# Altium PCB PCB1.PcbDoc (part 1 of 2)
Units mil, origin at the board's own origin, x right, y up, seen from the top; angles counter-clockwise.
Board outline 1945 x 1820 mil, 2 copper layers (Top Layer, Bottom Layer); 144 components, 11 nets, 468 pads, 0 vias.
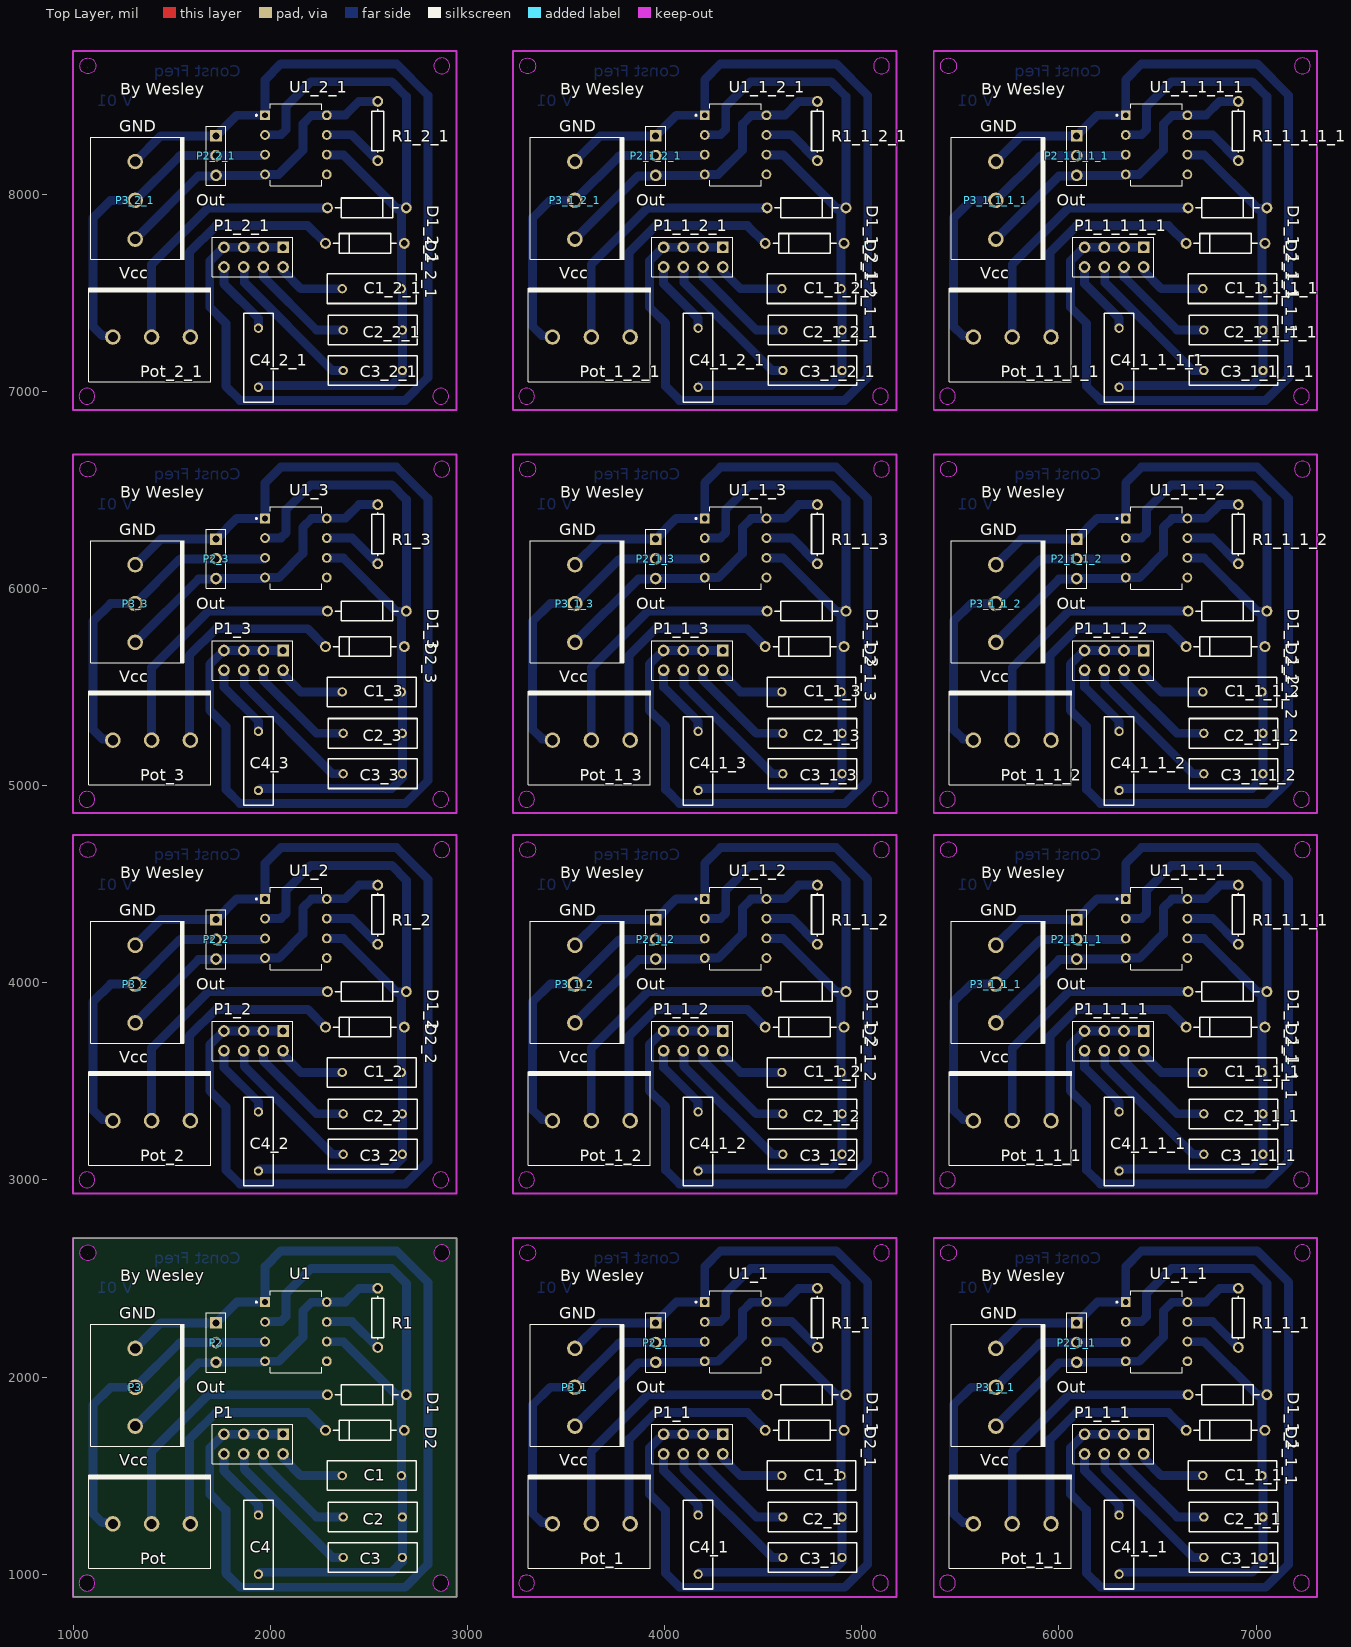
[diagram p0: Top Layer view]
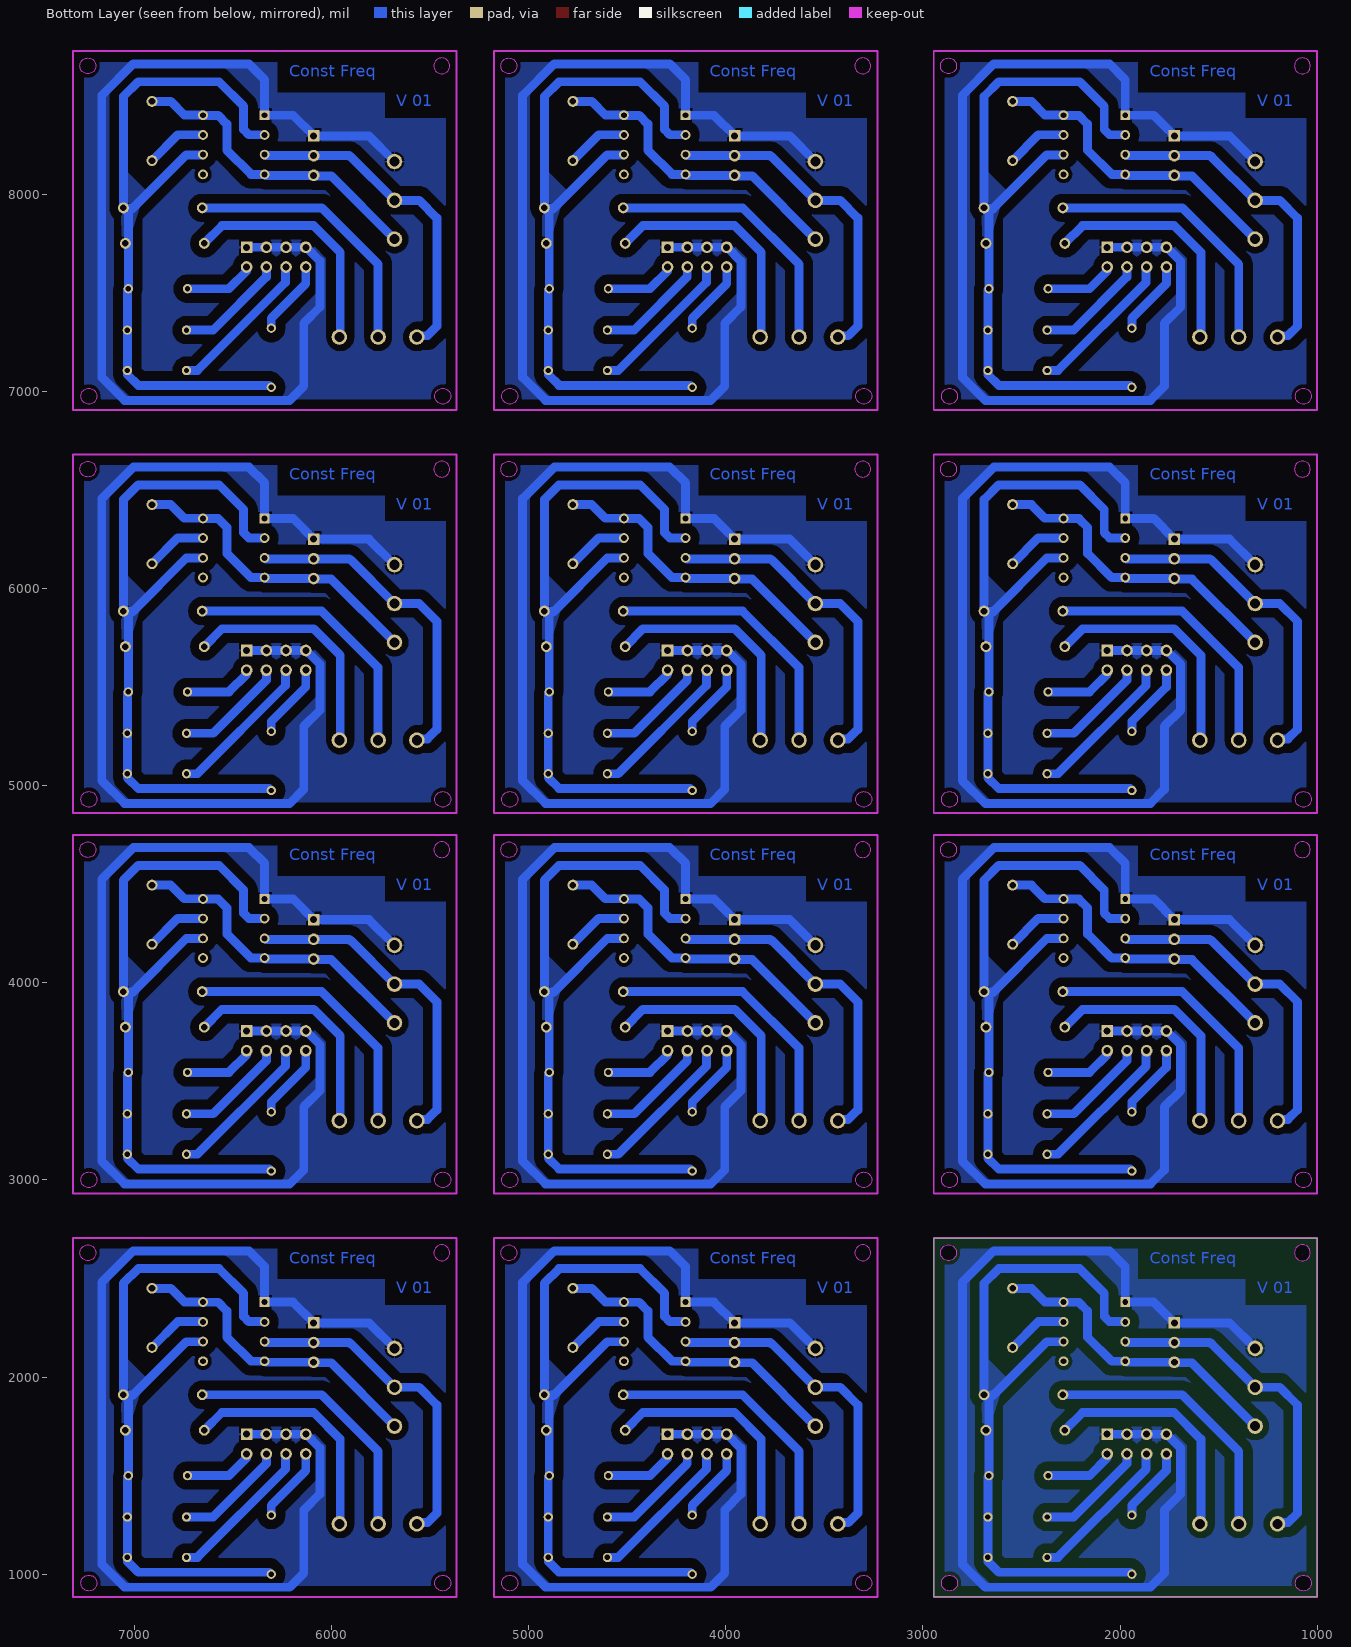
[diagram p1: Bottom Layer view, seen from below]

## Layer stack, top to bottom
Top Solder: solder mask 0.4, Solder Resist, Dk 3.5
Top Layer: signal copper 1.4
Dielectric 1: dielectric 12.6, FR-4, Dk 4.8
Bottom Layer: signal copper 1.4
Bottom Solder: solder mask 0.4, Solder Resist, Dk 3.5

## Board outline
1000,885 2945,885 2945,2705 1000,2705
cut-out: 1075,6595
cut-out: 1029.69,4930 ccw(c1070,4930) 1070,4889.69 ccw(c1070,4930) 1110.31,4930 ccw(c1070,4930) 1070,4970.31 ccw(c1070,4930)
cut-out: 1075,6564.69 cw(c1075,6605) 1034.69,6605 cw(c1075,6605) 1075,6645.31 cw(c1075,6605) 1115.31,6605 cw(c1075,6605)
cut-out: 2829.69,6605 ccw(c2870,6605) 2870,6564.69 ccw(c2870,6605) 2910.31,6605 ccw(c2870,6605) 2870,6645.31 ccw(c2870,6605)
cut-out: 2824.69,4930 ccw(c2865,4930) 2865,4889.69 ccw(c2865,4930) 2905.31,4930 ccw(c2865,4930) 2865,4970.31 ccw(c2865,4930)
cut-out: 5054.69,4930 ccw(c5095,4930) 5095,4889.69 ccw(c5095,4930) 5135.31,4930 ccw(c5095,4930) 5095,4970.31 ccw(c5095,4930)
cut-out: 5059.69,6605 ccw(c5100,6605) 5100,6564.69 ccw(c5100,6605) 5140.31,6605 ccw(c5100,6605) 5100,6645.31 ccw(c5100,6605)
cut-out: 3305,6564.69 cw(c3305,6605) 3264.69,6605 cw(c3305,6605) 3305,6645.31 cw(c3305,6605) 3345.31,6605 cw(c3305,6605)
cut-out: 3259.69,4930 ccw(c3300,4930) 3300,4889.69 ccw(c3300,4930) 3340.31,4930 ccw(c3300,4930) 3300,4970.31 ccw(c3300,4930)
cut-out: 3305,6595
cut-out: 5440,6595
cut-out: 5394.69,4930 ccw(c5435,4930) 5435,4889.69 ccw(c5435,4930) 5475.31,4930 ccw(c5435,4930) 5435,4970.31 ccw(c5435,4930)
cut-out: 5440,6564.69 cw(c5440,6605) 5399.69,6605 cw(c5440,6605) 5440,6645.31 cw(c5440,6605) 5480.31,6605 cw(c5440,6605)
cut-out: 7194.69,6605 ccw(c7235,6605) 7235,6564.69 ccw(c7235,6605) 7275.31,6605 ccw(c7235,6605) 7235,6645.31 ccw(c7235,6605)
cut-out: 7189.69,4930 ccw(c7230,4930) 7230,4889.69 ccw(c7230,4930) 7270.31,4930 ccw(c7230,4930) 7230,4970.31 ccw(c7230,4930)
cut-out: 7189.69,6975 ccw(c7230,6975) 7230,6934.69 ccw(c7230,6975) 7270.31,6975 ccw(c7230,6975) 7230,7015.31 ccw(c7230,6975)
cut-out: 7194.69,8650 ccw(c7235,8650) 7235,8609.69 ccw(c7235,8650) 7275.31,8650 ccw(c7235,8650) 7235,8690.31 ccw(c7235,8650)
cut-out: 5440,8609.69 cw(c5440,8650) 5399.69,8650 cw(c5440,8650) 5440,8690.31 cw(c5440,8650) 5480.31,8650 cw(c5440,8650)
cut-out: 5394.69,6975 ccw(c5435,6975) 5435,6934.69 ccw(c5435,6975) 5475.31,6975 ccw(c5435,6975) 5435,7015.31 ccw(c5435,6975)
cut-out: 5440,8640
cut-out: 3305,8640
cut-out: 3259.69,6975 ccw(c3300,6975) 3300,6934.69 ccw(c3300,6975) 3340.31,6975 ccw(c3300,6975) 3300,7015.31 ccw(c3300,6975)
cut-out: 3305,8609.69 cw(c3305,8650) 3264.69,8650 cw(c3305,8650) 3305,8690.31 cw(c3305,8650) 3345.31,8650 cw(c3305,8650)
cut-out: 5059.69,8650 ccw(c5100,8650) 5100,8609.69 ccw(c5100,8650) 5140.31,8650 ccw(c5100,8650) 5100,8690.31 ccw(c5100,8650)
cut-out: 5054.69,6975 ccw(c5095,6975) 5095,6934.69 ccw(c5095,6975) 5135.31,6975 ccw(c5095,6975) 5095,7015.31 ccw(c5095,6975)
cut-out: 2824.69,6975 ccw(c2865,6975) 2865,6934.69 ccw(c2865,6975) 2905.31,6975 ccw(c2865,6975) 2865,7015.31 ccw(c2865,6975)
cut-out: 2829.69,8650 ccw(c2870,8650) 2870,8609.69 ccw(c2870,8650) 2910.31,8650 ccw(c2870,8650) 2870,8690.31 ccw(c2870,8650)
cut-out: 1075,8609.69 cw(c1075,8650) 1034.69,8650 cw(c1075,8650) 1075,8690.31 cw(c1075,8650) 1115.31,8650 cw(c1075,8650)
cut-out: 1029.69,6975 ccw(c1070,6975) 1070,6934.69 ccw(c1070,6975) 1110.31,6975 ccw(c1070,6975) 1070,7015.31 ccw(c1070,6975)
cut-out: 1075,8640
cut-out: 1075,4665
cut-out: 1029.69,3000 ccw(c1070,3000) 1070,2959.69 ccw(c1070,3000) 1110.31,3000 ccw(c1070,3000) 1070,3040.31 ccw(c1070,3000)
cut-out: 1075,4634.69 cw(c1075,4675) 1034.69,4675 cw(c1075,4675) 1075,4715.31 cw(c1075,4675) 1115.31,4675 cw(c1075,4675)
cut-out: 2829.69,4675 ccw(c2870,4675) 2870,4634.69 ccw(c2870,4675) 2910.31,4675 ccw(c2870,4675) 2870,4715.31 ccw(c2870,4675)
cut-out: 2824.69,3000 ccw(c2865,3000) 2865,2959.69 ccw(c2865,3000) 2905.31,3000 ccw(c2865,3000) 2865,3040.31 ccw(c2865,3000)
cut-out: 5054.69,3000 ccw(c5095,3000) 5095,2959.69 ccw(c5095,3000) 5135.31,3000 ccw(c5095,3000) 5095,3040.31 ccw(c5095,3000)
cut-out: 5059.69,4675 ccw(c5100,4675) 5100,4634.69 ccw(c5100,4675) 5140.31,4675 ccw(c5100,4675) 5100,4715.31 ccw(c5100,4675)
cut-out: 3305,4634.69 cw(c3305,4675) 3264.69,4675 cw(c3305,4675) 3305,4715.31 cw(c3305,4675) 3345.31,4675 cw(c3305,4675)
cut-out: 3259.69,3000 ccw(c3300,3000) 3300,2959.69 ccw(c3300,3000) 3340.31,3000 ccw(c3300,3000) 3300,3040.31 ccw(c3300,3000)
cut-out: 3305,4665
cut-out: 5440,4665
cut-out: 5394.69,3000 ccw(c5435,3000) 5435,2959.69 ccw(c5435,3000) 5475.31,3000 ccw(c5435,3000) 5435,3040.31 ccw(c5435,3000)
cut-out: 5440,4634.69 cw(c5440,4675) 5399.69,4675 cw(c5440,4675) 5440,4715.31 cw(c5440,4675) 5480.31,4675 cw(c5440,4675)
cut-out: 7194.69,4675 ccw(c7235,4675) 7235,4634.69 ccw(c7235,4675) 7275.31,4675 ccw(c7235,4675) 7235,4715.31 ccw(c7235,4675)
cut-out: 7189.69,3000 ccw(c7230,3000) 7230,2959.69 ccw(c7230,3000) 7270.31,3000 ccw(c7230,3000) 7230,3040.31 ccw(c7230,3000)
cut-out: 7189.69,955 ccw(c7230,955) 7230,914.69 ccw(c7230,955) 7270.31,955 ccw(c7230,955) 7230,995.31 ccw(c7230,955)
cut-out: 7194.69,2630 ccw(c7235,2630) 7235,2589.69 ccw(c7235,2630) 7275.31,2630 ccw(c7235,2630) 7235,2670.31 ccw(c7235,2630)
cut-out: 5440,2589.69 cw(c5440,2630) 5399.69,2630 cw(c5440,2630) 5440,2670.31 cw(c5440,2630) 5480.31,2630 cw(c5440,2630)
cut-out: 5394.69,955 ccw(c5435,955) 5435,914.69 ccw(c5435,955) 5475.31,955 ccw(c5435,955) 5435,995.31 ccw(c5435,955)
cut-out: 5440,2620
cut-out: 3305,2620
cut-out: 3259.69,955 ccw(c3300,955) 3300,914.69 ccw(c3300,955) 3340.31,955 ccw(c3300,955) 3300,995.31 ccw(c3300,955)
cut-out: 3305,2589.69 cw(c3305,2630) 3264.69,2630 cw(c3305,2630) 3305,2670.31 cw(c3305,2630) 3345.31,2630 cw(c3305,2630)
cut-out: 5059.69,2630 ccw(c5100,2630) 5100,2589.69 ccw(c5100,2630) 5140.31,2630 ccw(c5100,2630) 5100,2670.31 ccw(c5100,2630)
cut-out: 5054.69,955 ccw(c5095,955) 5095,914.69 ccw(c5095,955) 5135.31,955 ccw(c5095,955) 5095,995.31 ccw(c5095,955)
cut-out: 2824.69,955 ccw(c2865,955) 2865,914.69 ccw(c2865,955) 2905.31,955 ccw(c2865,955) 2865,995.31 ccw(c2865,955)
cut-out: 2829.69,2630 ccw(c2870,2630) 2870,2589.69 ccw(c2870,2630) 2910.31,2630 ccw(c2870,2630) 2870,2670.31 ccw(c2870,2630)
cut-out: 1075,2589.69 cw(c1075,2630) 1034.69,2630 cw(c1075,2630) 1075,2670.31 cw(c1075,2630) 1115.31,2630 cw(c1075,2630)
cut-out: 1029.69,955 ccw(c1070,955) 1070,914.69 ccw(c1070,955) 1110.31,955 ccw(c1070,955) 1070,995.31 ccw(c1070,955)
cut-out: 1075,2620

## Design rules (kind name [scope] priority, off if disabled: settings)
Clearance [All] p1: gap=20 ignorepadtopadclearanceinfootprint=FALSE except(50: Arc-Fill Arc-Poly Arc-Region Track-Fill Track-Poly Track-Region Fill-Text Poly-Text Region-Text)
PolygonConnect [All] p1: connectstyle=Relief reliefconductorwidth=10 reliefentries=4 polygonreliefangle="90 Angle" airgapwidth=10
RoutingVias [All] p1: holewidth=28 width=50 viastyle="Through Hole" minholewidth=28 minwidth=50 maxholewidth=28 maxwidth=50
SolderMaskExpansion [All] p1: expansion=4
Width [All] p1: maxlimit=50 minlimit=40 preferedwidth=45 minimp=50.000000 maximp=50.000000 favimp=50.000000
30 further rules are at their usual default settings.

## Classes and differential pairs
component class Sheet1: C1 C2 C3 C4 D1 D2 P1 P2 P3 Pot R1 U1

## Components (designator, comment, footprint, x,y, rotation, side; value= is the part's Value field where it differs from the comment)
C1 "Cap" RAD-0.3 2515,1500 r0 top value=22uF
C1_1 "Cap" RAD-0.3 4745,1500 r0 top value=22uF (schematic designator C1)
C1_1_1 "Cap" RAD-0.3 6880,1500 r0 top value=22uF (schematic designator C1)
C1_1_1_1 "Cap" RAD-0.3 6880,3545 r0 top value=22uF (schematic designator C1)
C1_1_1_1_1 "Cap" RAD-0.3 6880,7520 r0 top value=22uF (schematic designator C1)
C1_1_1_2 "Cap" RAD-0.3 6880,5475 r0 top value=22uF (schematic designator C1)
C1_1_2 "Cap" RAD-0.3 4745,3545 r0 top value=22uF (schematic designator C1)
C1_1_2_1 "Cap" RAD-0.3 4745,7520 r0 top value=22uF (schematic designator C1)
C1_1_3 "Cap" RAD-0.3 4745,5475 r0 top value=22uF (schematic designator C1)
C1_2 "Cap" RAD-0.3 2515,3545 r0 top value=22uF (schematic designator C1)
C1_2_1 "Cap" RAD-0.3 2515,7520 r0 top value=22uF (schematic designator C1)
C1_3 "Cap" RAD-0.3 2515,5475 r0 top value=22uF (schematic designator C1)
C2 "Cap" RAD-0.3 2520,1290 r0 top value=100nF
C2_1 "Cap" RAD-0.3 4750,1290 r0 top value=100nF (schematic designator C2)
C2_1_1 "Cap" RAD-0.3 6885,1290 r0 top value=100nF (schematic designator C2)
C2_1_1_1 "Cap" RAD-0.3 6885,3335 r0 top value=100nF (schematic designator C2)
C2_1_1_1_1 "Cap" RAD-0.3 6885,7310 r0 top value=100nF (schematic designator C2)
C2_1_1_2 "Cap" RAD-0.3 6885,5265 r0 top value=100nF (schematic designator C2)
C2_1_2 "Cap" RAD-0.3 4750,3335 r0 top value=100nF (schematic designator C2)
C2_1_2_1 "Cap" RAD-0.3 4750,7310 r0 top value=100nF (schematic designator C2)
C2_1_3 "Cap" RAD-0.3 4750,5265 r0 top value=100nF (schematic designator C2)
C2_2 "Cap" RAD-0.3 2520,3335 r0 top value=100nF (schematic designator C2)
C2_2_1 "Cap" RAD-0.3 2520,7310 r0 top value=100nF (schematic designator C2)
C2_3 "Cap" RAD-0.3 2520,5265 r0 top value=100nF (schematic designator C2)
C3 "Cap" RAD-0.3 2520,1085 r0 top value=1uF
C3_1 "Cap" RAD-0.3 4750,1085 r0 top value=1uF (schematic designator C3)
C3_1_1 "Cap" RAD-0.3 6885,1085 r0 top value=1uF (schematic designator C3)
C3_1_1_1 "Cap" RAD-0.3 6885,3130 r0 top value=1uF (schematic designator C3)
C3_1_1_1_1 "Cap" RAD-0.3 6885,7105 r0 top value=1uF (schematic designator C3)
C3_1_1_2 "Cap" RAD-0.3 6885,5060 r0 top value=1uF (schematic designator C3)
C3_1_2 "Cap" RAD-0.3 4750,3130 r0 top value=1uF (schematic designator C3)
C3_1_2_1 "Cap" RAD-0.3 4750,7105 r0 top value=1uF (schematic designator C3)
C3_1_3 "Cap" RAD-0.3 4750,5060 r0 top value=1uF (schematic designator C3)
C3_2 "Cap" RAD-0.3 2520,3130 r0 top value=1uF (schematic designator C3)
C3_2_1 "Cap" RAD-0.3 2520,7105 r0 top value=1uF (schematic designator C3)
C3_3 "Cap" RAD-0.3 2520,5060 r0 top value=1uF (schematic designator C3)
C4 "Cap" RAD-0.3 1940,1150 r270 top value=10uF
C4_1 "Cap" RAD-0.3 4170,1150 r270 top value=10uF (schematic designator C4)
C4_1_1 "Cap" RAD-0.3 6305,1150 r270 top value=10uF (schematic designator C4)
C4_1_1_1 "Cap" RAD-0.3 6305,3195 r270 top value=10uF (schematic designator C4)
C4_1_1_1_1 "Cap" RAD-0.3 6305,7170 r270 top value=10uF (schematic designator C4)
C4_1_1_2 "Cap" RAD-0.3 6305,5125 r270 top value=10uF (schematic designator C4)
C4_1_2 "Cap" RAD-0.3 4170,3195 r270 top value=10uF (schematic designator C4)
C4_1_2_1 "Cap" RAD-0.3 4170,7170 r270 top value=10uF (schematic designator C4)
C4_1_3 "Cap" RAD-0.3 4170,5125 r270 top value=10uF (schematic designator C4)
C4_2 "Cap" RAD-0.3 1940,3195 r270 top value=10uF (schematic designator C4)
C4_2_1 "Cap" RAD-0.3 1940,7170 r270 top value=10uF (schematic designator C4)
C4_3 "Cap" RAD-0.3 1940,5125 r270 top value=10uF (schematic designator C4)
D1 "Diode" DIODE-0.4 2490,1910 r0 top
D1_1 "Diode" DIODE-0.4 4720,1910 r0 top (schematic designator D1)
D1_1_1 "Diode" DIODE-0.4 6855,1910 r0 top (schematic designator D1)
D1_1_1_1 "Diode" DIODE-0.4 6855,3955 r0 top (schematic designator D1)
D1_1_1_1_1 "Diode" DIODE-0.4 6855,7930 r0 top (schematic designator D1)
D1_1_1_2 "Diode" DIODE-0.4 6855,5885 r0 top (schematic designator D1)
D1_1_2 "Diode" DIODE-0.4 4720,3955 r0 top (schematic designator D1)
D1_1_2_1 "Diode" DIODE-0.4 4720,7930 r0 top (schematic designator D1)
D1_1_3 "Diode" DIODE-0.4 4720,5885 r0 top (schematic designator D1)
D1_2 "Diode" DIODE-0.4 2490,3955 r0 top (schematic designator D1)
D1_2_1 "Diode" DIODE-0.4 2490,7930 r0 top (schematic designator D1)
D1_3 "Diode" DIODE-0.4 2490,5885 r0 top (schematic designator D1)
D2 "Diode" DIODE-0.4 2480,1730 r180 top
D2_1 "Diode" DIODE-0.4 4710,1730 r180 top (schematic designator D2)
D2_1_1 "Diode" DIODE-0.4 6845,1730 r180 top (schematic designator D2)
D2_1_1_1 "Diode" DIODE-0.4 6845,3775 r180 top (schematic designator D2)
D2_1_1_1_1 "Diode" DIODE-0.4 6845,7750 r180 top (schematic designator D2)
D2_1_1_2 "Diode" DIODE-0.4 6845,5705 r180 top (schematic designator D2)
D2_1_2 "Diode" DIODE-0.4 4710,3775 r180 top (schematic designator D2)
D2_1_2_1 "Diode" DIODE-0.4 4710,7750 r180 top (schematic designator D2)
D2_1_3 "Diode" DIODE-0.4 4710,5705 r180 top (schematic designator D2)
D2_2 "Diode" DIODE-0.4 2480,3775 r180 top (schematic designator D2)
D2_2_1 "Diode" DIODE-0.4 2480,7750 r180 top (schematic designator D2)
D2_3 "Diode" DIODE-0.4 2480,5705 r180 top (schematic designator D2)
P1 "MHDR2X4" HEADER_2X4 1915,1660 r180 top
P1_1 "MHDR2X4" HEADER_2X4 4145,1660 r180 top (schematic designator P1)
P1_1_1 "MHDR2X4" HEADER_2X4 6280,1660 r180 top (schematic designator P1)
P1_1_1_1 "MHDR2X4" HEADER_2X4 6280,3705 r180 top (schematic designator P1)
P1_1_1_1_1 "MHDR2X4" HEADER_2X4 6280,7680 r180 top (schematic designator P1)
P1_1_1_2 "MHDR2X4" HEADER_2X4 6280,5635 r180 top (schematic designator P1)
P1_1_2 "MHDR2X4" HEADER_2X4 4145,3705 r180 top (schematic designator P1)
P1_1_2_1 "MHDR2X4" HEADER_2X4 4145,7680 r180 top (schematic designator P1)
P1_1_3 "MHDR2X4" HEADER_2X4 4145,5635 r180 top (schematic designator P1)
P1_2 "MHDR2X4" HEADER_2X4 1915,3705 r180 top (schematic designator P1)
P1_2_1 "MHDR2X4" HEADER_2X4 1915,7680 r180 top (schematic designator P1)
P1_3 "MHDR2X4" HEADER_2X4 1915,5635 r180 top (schematic designator P1)
P2 "MHDR1X3" HEADER_1X3 1775,2175 r270 top
P2_1 "MHDR1X3" HEADER_1X3 4005,2175 r270 top (schematic designator P2)
P2_1_1 "MHDR1X3" HEADER_1X3 6140,2175 r270 top (schematic designator P2)
P2_1_1_1 "MHDR1X3" HEADER_1X3 6140,4220 r270 top (schematic designator P2)
P2_1_1_1_1 "MHDR1X3" HEADER_1X3 6140,8195 r270 top (schematic designator P2)
P2_1_1_2 "MHDR1X3" HEADER_1X3 6140,6150 r270 top (schematic designator P2)
P2_1_2 "MHDR1X3" HEADER_1X3 4005,4220 r270 top (schematic designator P2)
P2_1_2_1 "MHDR1X3" HEADER_1X3 4005,8195 r270 top (schematic designator P2)
P2_1_3 "MHDR1X3" HEADER_1X3 4005,6150 r270 top (schematic designator P2)
P2_2 "MHDR1X3" HEADER_1X3 1775,4220 r270 top (schematic designator P2)
P2_2_1 "MHDR1X3" HEADER_1X3 1775,8195 r270 top (schematic designator P2)
P2_3 "MHDR1X3" HEADER_1X3 1775,6150 r270 top (schematic designator P2)
P3 "MHDR1X3" CN_KRE_3 1315,1948.15 r90 top
P3_1 "MHDR1X3" CN_KRE_3 3545,1948.15 r90 top (schematic designator P3)
P3_1_1 "MHDR1X3" CN_KRE_3 5680,1948.15 r90 top (schematic designator P3)
P3_1_1_1 "MHDR1X3" CN_KRE_3 5680,3993.15 r90 top (schematic designator P3)
P3_1_1_1_1 "MHDR1X3" CN_KRE_3 5680,7968.15 r90 top (schematic designator P3)
P3_1_1_2 "MHDR1X3" CN_KRE_3 5680,5923.15 r90 top (schematic designator P3)
P3_1_2 "MHDR1X3" CN_KRE_3 3545,3993.15 r90 top (schematic designator P3)
P3_1_2_1 "MHDR1X3" CN_KRE_3 3545,7968.15 r90 top (schematic designator P3)
P3_1_3 "MHDR1X3" CN_KRE_3 3545,5923.15 r90 top (schematic designator P3)
P3_2 "MHDR1X3" CN_KRE_3 1315,3993.15 r90 top (schematic designator P3)
P3_2_1 "MHDR1X3" CN_KRE_3 1315,7968.15 r90 top (schematic designator P3)
P3_3 "MHDR1X3" CN_KRE_3 1315,5923.15 r90 top (schematic designator P3)
Pot "Res Adj1" CN_KRE_3 1398.15,1255 r180 top value=10K (schematic designator R2)
Pot_1 "Res Adj1" CN_KRE_3 3628.15,1255 r180 top value=10K (schematic designator R2)
Pot_1_1 "Res Adj1" CN_KRE_3 5763.15,1255 r180 top value=10K (schematic designator R2)
Pot_1_1_1 "Res Adj1" CN_KRE_3 5763.15,3300 r180 top value=10K (schematic designator R2)
Pot_1_1_1_1 "Res Adj1" CN_KRE_3 5763.15,7275 r180 top value=10K (schematic designator R2)
Pot_1_1_2 "Res Adj1" CN_KRE_3 5763.15,5230 r180 top value=10K (schematic designator R2)
Pot_1_2 "Res Adj1" CN_KRE_3 3628.15,3300 r180 top value=10K (schematic designator R2)
Pot_1_2_1 "Res Adj1" CN_KRE_3 3628.15,7275 r180 top value=10K (schematic designator R2)
Pot_1_3 "Res Adj1" CN_KRE_3 3628.15,5230 r180 top value=10K (schematic designator R2)
Pot_2 "Res Adj1" CN_KRE_3 1398.15,3300 r180 top value=10K (schematic designator R2)
Pot_2_1 "Res Adj1" CN_KRE_3 1398.15,7275 r180 top value=10K (schematic designator R2)
Pot_3 "Res Adj1" CN_KRE_3 1398.15,5230 r180 top value=10K (schematic designator R2)
R1 "Res1" AXIAL-0.3 2545,2300 r90 top value=1K
R1_1 "Res1" AXIAL-0.3 4775,2300 r90 top value=1K (schematic designator R1)
R1_1_1 "Res1" AXIAL-0.3 6910,2300 r90 top value=1K (schematic designator R1)
R1_1_1_1 "Res1" AXIAL-0.3 6910,4345 r90 top value=1K (schematic designator R1)
R1_1_1_1_1 "Res1" AXIAL-0.3 6910,8320 r90 top value=1K (schematic designator R1)
R1_1_1_2 "Res1" AXIAL-0.3 6910,6275 r90 top value=1K (schematic designator R1)
R1_1_2 "Res1" AXIAL-0.3 4775,4345 r90 top value=1K (schematic designator R1)
R1_1_2_1 "Res1" AXIAL-0.3 4775,8320 r90 top value=1K (schematic designator R1)
R1_1_3 "Res1" AXIAL-0.3 4775,6275 r90 top value=1K (schematic designator R1)
R1_2 "Res1" AXIAL-0.3 2545,4345 r90 top value=1K (schematic designator R1)
R1_2_1 "Res1" AXIAL-0.3 2545,8320 r90 top value=1K (schematic designator R1)
R1_3 "Res1" AXIAL-0.3 2545,6275 r90 top value=1K (schematic designator R1)
U1 "NE555" *DIP794W45P254L1060H508Q8 2130,2230 r0 top
U1_1 "NE555" *DIP794W45P254L1060H508Q8 4360,2230 r0 top (schematic designator U1)
U1_1_1 "NE555" *DIP794W45P254L1060H508Q8 6495,2230 r0 top (schematic designator U1)
U1_1_1_1 "NE555" *DIP794W45P254L1060H508Q8 6495,4275 r0 top (schematic designator U1)
U1_1_1_1_1 "NE555" *DIP794W45P254L1060H508Q8 6495,8250 r0 top (schematic designator U1)
U1_1_1_2 "NE555" *DIP794W45P254L1060H508Q8 6495,6205 r0 top (schematic designator U1)
U1_1_2 "NE555" *DIP794W45P254L1060H508Q8 4360,4275 r0 top (schematic designator U1)
U1_1_2_1 "NE555" *DIP794W45P254L1060H508Q8 4360,8250 r0 top (schematic designator U1)
U1_1_3 "NE555" *DIP794W45P254L1060H508Q8 4360,6205 r0 top (schematic designator U1)
U1_2 "NE555" *DIP794W45P254L1060H508Q8 2130,4275 r0 top (schematic designator U1)
U1_2_1 "NE555" *DIP794W45P254L1060H508Q8 2130,8250 r0 top (schematic designator U1)
U1_3 "NE555" *DIP794W45P254L1060H508Q8 2130,6205 r0 top (schematic designator U1)

## Footprints (in the part's own frame and the unit in brackets; to place one, negate y for a bottom-side part, rotate by r counter-clockwise, add the part's x,y. Pads: shape width x height; smd on the part's side, far side on the other; paste and mask are expansions set on the pad)
*DIP794W45P254L1060H508Q8 [mm]
  rect 1.268x1.268 hole 0.76: 1(-3.97,3.81)
  round 1.268 hole 0.76: 2(-3.97,1.27) 3(-3.97,-1.27) 4(-3.97,-3.81) 5(3.97,-3.81) 6(3.97,-1.27) 7(3.97,1.27) 8(3.97,3.81)
  silkscreen extent -5.2,-5.3 3.3,5.3
AXIAL-0.3 [mm] "Axial Device, Thru-Hole; 2 Leads; 0.3 in Pin Spacing"
  round 1.4 hole 0.85: 1(-3.81,0) 2(3.81,0)
  silkscreen extent -2.77,-0.76 2.77,0.76
CN_KRE_3 [mm]
  round 2 hole 1.3: 1(-5,0) 2(0,0) 3(5,0)
  silkscreen extent -7.67,-6.38 8.1,5.74, body extent -7.53,-5.61 8.04,5.59, height 18
DIODE-0.4 [mm] "Diode, Thru-Hole; 2 Leads; 0.4 in Pin Spacing"
  round 1.4 hole 0.85: 1(-5.08,0) 2(5.08,0)
  silkscreen extent -4.06,-1.27 4.06,1.27
HEADER_1X3 [mm] "Connector; Header; 3x2 Position"
  rect 1.5x1.5 hole 0.9: 1(-2.54,-1.27)
  round 1.5 hole 0.9: 2(0,-1.27) 3(2.54,-1.27)
  silkscreen extent -3.81,-2.54 3.81,0, body extent -3.81,-2.54 3.81,0, height 9.5
HEADER_2X4 [mm]
  rect 1.5x1.5 hole 0.9: 1(-3.81,-1.27)
  round 1.5 hole 0.9: 2(-3.81,1.27) 3(-1.27,-1.27) 4(-1.27,1.27) 5(1.27,-1.27) 6(1.27,1.27) 7(3.81,-1.27) 8(3.81,1.27)
  silkscreen extent -5.08,-2.54 5.33,2.54
RAD-0.3 [mm] "Radial Cap, Thru-Hole; 2 Leads; 0.3 in Pin Spacing"
  round 1.2 hole 0.7: 1(-3.81,0) 2(3.81,0)
  silkscreen extent -5.71,-1.91 5.71,1.91

## Part data
C1 C1_1 C1_1_1 C1_1_1_1 C1_1_1_1_1 C1_1_1_2 C1_1_2 C1_1_2_1 C1_1_3 C1_2 C1_2_1 C1_3 C2 C2_1 C2_1_1 C2_1_1_1 C2_1_1_1_1 C2_1_1_2 C2_1_2 C2_1_2_1 C2_1_3 C2_2 C2_2_1 C2_3 C3 C3_1 C3_1_1 C3_1_1_1 C3_1_1_1_1 C3_1_1_2 C3_1_2 C3_1_2_1 C3_1_3 C3_2 C3_2_1 C3_3 C4 C4_1 C4_1_1 C4_1_1_1 C4_1_1_1_1 C4_1_1_2 C4_1_2 C4_1_2_1 C4_1_3 C4_2 C4_2_1 C4_3: "Capacitor", LatestRevisionDate=17-Jul-2002, LatestRevisionNote="Re-released for DXP Platform.", PackageDescription="Radial Cap, Thru-Hole; 2 Leads; 0.3 in Pin Spacing", PackageReference=RAD-0.3, Published=8-Jun-2000, Publisher="Altium Limited"
D1 D1_1 D1_1_1 D1_1_1_1 D1_1_1_1_1 D1_1_1_2 D1_1_2 D1_1_2_1 D1_1_3 D1_2 D1_2_1 D1_3 D2 D2_1 D2_1_1 D2_1_1_1 D2_1_1_1_1 D2_1_1_2 D2_1_2 D2_1_2_1 D2_1_3 D2_2 D2_2_1 D2_3: "Default Diode", Code_JEDEC=DO-214-AB, LatestRevisionDate=17-Jul-2002, LatestRevisionNote="Re-released for DXP Platform.", PackageDescription="DO-214-AB/SMC; 2 C-Bend Leads; Body 7.9 x 5.9 mm, inc. leads (LxW)", PackageReference=SMC, PackageVersion=Sep-1996, Published=8-Jun-2000, Publisher="Altium Limited"
P1 P1_1 P1_1_1 P1_1_1_1 P1_1_1_1_1 P1_1_1_2 P1_1_2 P1_1_2_1 P1_1_3 P1_2 P1_2_1 P1_3: "Header, 4-Pin, Dual row", LatestRevisionDate=17-Jul-2002, LatestRevisionNote="Re-released for DXP Platform.", Publisher="Altium Limited"
P2 P2_1 P2_1_1 P2_1_1_1 P2_1_1_1_1 P2_1_1_2 P2_1_2 P2_1_2_1 P2_1_3 P2_2 P2_2_1 P2_3 P3 P3_1 P3_1_1 P3_1_1_1 P3_1_1_1_1 P3_1_1_2 P3_1_2 P3_1_2_1 P3_1_3 P3_2 P3_2_1 P3_3: "Header, 3-Pin", LatestRevisionDate=17-Jul-2002, LatestRevisionNote="Re-released for DXP Platform.", Publisher="Altium Limited"
Pot Pot_1 Pot_1_1 Pot_1_1_1 Pot_1_1_1_1 Pot_1_1_2 Pot_1_2 Pot_1_2_1 Pot_1_3 Pot_2 Pot_2_1 Pot_3: "Variable Resistor", LatestRevisionDate=17-Jul-2002, LatestRevisionNote="Re-released for DXP Platform.", PackageDescription="Axial Device, Thru-Hole; 2 Leads; 0.7 in Pin Spacing", PackageReference=AXIAL-0.7, Published=8-Jun-2000, Publisher="Altium Limited", Set Position=0.5
R1 R1_1 R1_1_1 R1_1_1_1 R1_1_1_1_1 R1_1_1_2 R1_1_2 R1_1_2_1 R1_1_3 R1_2 R1_2_1 R1_3: "Resistor", LatestRevisionDate=17-Jul-2002, LatestRevisionNote="Re-released for DXP Platform.", PackageDescription="Axial Device, Thru-Hole; 2 Leads; 0.3 in Pin Spacing", PackageReference=AXIAL-0.3, Published=8-Jun-2000, Publisher="Altium Limited"
U1 U1_1 U1_1_1 U1_1_1_1 U1_1_1_1_1 U1_1_1_2 U1_1_2 U1_1_2_1 U1_1_3 U1_2 U1_2_1 U1_3: Package="SOIC-8 Conrad", Digi-Key_Part_Number=296-6501-1-ND, Digi-Key_Purchase_URL=https://www.digikey.com.br/product-detail/en/texas-instruments/NE555DR/296-6501-1-ND/372490?utm_source=snapeda&utm_medium=aggregator&utm_campaign=symbol, MF="Texas Instruments", MP=NE555, SnapEDA_Link=https://www.snapeda.com/parts/NE555/Texas%20Instruments/view-part/?ref=snap

## Nets (pads, with @x,y where several pads share a name; then routed paths per layer and width w, separated by ;. In a path a pad name is that pad's centre, name@x,y a point inside that pad or via, vN(x,y) a via of type N, cw(c..) or ccw(c..) an arc to the next point about the centre after c; other vN are vias at no path point)
GND: P1.1 P1.3 P1.5 P1.7 P2.1 P3.3 U1.1 | length 5464.1
  Bottom Layer w45: P3.3@1315,2145 1445,2275 P2.1@1725,2275 1830,2380 U1.1@1973.7,2380 1973.7,2560.06 2053.64,2640 2640,2640 2800,2480 2800,1050 2683.88,933.88 1846.36,933.88 1775,1005.24 1775,1325 1692.97,1407.03 1692.97,1639.83 1763.14,1710 P1.7@1765,1710 P1.5@1865,1710 P1.3@1965,1710 P1.1@2065,1710
NetC1_1: C1.1 P1.2 | length 357.3
  Bottom Layer w45: P1.2@2065,1610 2065,1590 2155,1500 C1.1@2365,1500
NetC1_2: C1.2 C2.2 C3.2 C4.2 D1.2 D2.1 U1.2 U1.6 | length 3624.4
  Bottom Layer w45: C4.2@1940,1000 1950,1010 2615,1010 2670,1065 C3.2@2670,1085 C2.2@2670,1290 2670,1494.39 2665,1499.39 C1.2@2665,1500 2665,1885 D1.2@2688.06,1908.06 ; U1.2@1973.7,2280 1974.64,2280.94 2053.64,2280.94 2080,2307.3 2080,2425 2205,2550 2615,2550 2690,2475 D1.2@2690,1910 D1.2@2688.06,1908.06 ; U1.6@2286.3,2180 2287.24,2179.06 2370.94,2179.06 2645,1905 2648.06,1908.06 D1.2@2688.06,1908.06
NetC2_1: C2.1 P1.4 | length 566.8
  Bottom Layer w45: P1.4@1965,1610 1965,1560 2234.57,1290.43 2369.57,1290.43 C2.1@2370,1290
NetC3_1: C3.1 P1.6 | length 766.4
  Bottom Layer w45: P1.6@1865,1610 1867.69,1607.31 1867.69,1532.31 2315,1085 C3.1@2370,1085
NetC4_1: C4.1 P1.8 | length 382.5
  Bottom Layer w45: P1.8@1765,1610 1765,1525 1940,1350 C4.1@1940,1300
NetD1_1: D1.1 Pot.2 | length 1378.8
  Bottom Layer w45: Pot.2@1398.15,1255 1398.15,1623.15 1685,1910 D1.1@2290,1910
NetD2_2: D2.2 Pot.1 | length 1213.2
  Bottom Layer w45: Pot.1@1590,1255 1590,1685 1725,1820 2190,1820 D2.2@2280,1730
NetP2_2: P2.2 P3.2 Pot.3 U1.3 | length 1679.2
  Bottom Layer w45: Pot.3@1201.3,1255 1194.84,1261.46 1148.54,1261.46 1100,1310 1100,1858.15 1190,1948.15 P3.2@1315,1948.15 1536.85,2170 1540,2170 1545,2175 P2.2@1725,2175 1967.37,2175 1972.37,2180 U1.3@1973.7,2180
NetR1_1: R1.1 U1.7 | length 313.3
  Bottom Layer w45: U1.7@2286.3,2280 2287.24,2280.94 2414.06,2280.94 R1.1@2545,2150
VCC: P2.3 P3.1 R1.2 U1.4 U1.8 | length 1596.9
  Bottom Layer w45: P3.1@1315,1751.3 1636.01,2072.31 1722.31,2072.31 P2.3@1725,2075 1967.37,2075 1972.37,2080 U1.4@1973.7,2080 2042.25,2080 2165,2202.75 2165,2335 2209.06,2379.06 2285.36,2379.06 U1.8@2286.3,2380 2287.24,2380.94 2380.94,2380.94 2450,2450 R1.2@2545,2450
pads on no net: C1_1.1 C1_1.2 C1_1_1.1 C1_1_1.2 C1_1_1_1.1 C1_1_1_1.2 C1_1_1_1_1.1 C1_1_1_1_1.2 C1_1_1_2.1 C1_1_1_2.2 C1_1_2.1 C1_1_2.2 C1_1_2_1.1 C1_1_2_1.2 C1_1_3.1 C1_1_3.2 C1_2.1 C1_2.2 C1_2_1.1 C1_2_1.2 C1_3.1 C1_3.2 C2_1.1 C2_1.2 C2_1_1.1 C2_1_1.2 C2_1_1_1.1 C2_1_1_1.2 C2_1_1_1_1.1 C2_1_1_1_1.2 C2_1_1_2.1 C2_1_1_2.2 C2_1_2.1 C2_1_2.2 C2_1_2_1.1 C2_1_2_1.2 C2_1_3.1 C2_1_3.2 C2_2.1 C2_2.2 C2_2_1.1 C2_2_1.2 C2_3.1 C2_3.2 C3_1.1 C3_1.2 C3_1_1.1 C3_1_1.2 C3_1_1_1.1 C3_1_1_1.2 C3_1_1_1_1.1 C3_1_1_1_1.2 C3_1_1_2.1 C3_1_1_2.2 C3_1_2.1 C3_1_2.2 C3_1_2_1.1 C3_1_2_1.2 C3_1_3.1 C3_1_3.2 C3_2.1 C3_2.2 C3_2_1.1 C3_2_1.2 C3_3.1 C3_3.2 C4_1.1 C4_1.2 C4_1_1.1 C4_1_1.2 C4_1_1_1.1 C4_1_1_1.2 C4_1_1_1_1.1 C4_1_1_1_1.2 C4_1_1_2.1 C4_1_1_2.2 C4_1_2.1 C4_1_2.2 C4_1_2_1.1 C4_1_2_1.2 C4_1_3.1 C4_1_3.2 C4_2.1 C4_2.2 C4_2_1.1 C4_2_1.2 C4_3.1 C4_3.2 D1_1.1 D1_1.2 D1_1_1.1 D1_1_1.2 D1_1_1_1.1 D1_1_1_1.2 D1_1_1_1_1.1 D1_1_1_1_1.2 D1_1_1_2.1 D1_1_1_2.2 D1_1_2.1 D1_1_2.2 D1_1_2_1.1 D1_1_2_1.2 D1_1_3.1 D1_1_3.2 D1_2.1 D1_2.2 D1_2_1.1 D1_2_1.2 D1_3.1 D1_3.2 D2_1.1 D2_1.2 D2_1_1.1 D2_1_1.2 D2_1_1_1.1 D2_1_1_1.2 D2_1_1_1_1.1 D2_1_1_1_1.2 D2_1_1_2.1 D2_1_1_2.2 D2_1_2.1 D2_1_2.2 D2_1_2_1.1 D2_1_2_1.2 D2_1_3.1 D2_1_3.2 D2_2.1 D2_2.2 D2_2_1.1 D2_2_1.2 D2_3.1 D2_3.2 P1_1.1 P1_1.2 P1_1.3 P1_1.4 P1_1.5 P1_1.6 P1_1.7 P1_1.8 P1_1_1.1 P1_1_1.2 P1_1_1.3 P1_1_1.4 P1_1_1.5 P1_1_1.6 P1_1_1.7 P1_1_1.8 P1_1_1_1.1 P1_1_1_1.2 P1_1_1_1.3 P1_1_1_1.4 P1_1_1_1.5 P1_1_1_1.6 P1_1_1_1.7 P1_1_1_1.8 P1_1_1_1_1.1 P1_1_1_1_1.2 P1_1_1_1_1.3 P1_1_1_1_1.4 P1_1_1_1_1.5 P1_1_1_1_1.6 P1_1_1_1_1.7 P1_1_1_1_1.8 P1_1_1_2.1 P1_1_1_2.2 P1_1_1_2.3 P1_1_1_2.4 P1_1_1_2.5 P1_1_1_2.6 P1_1_1_2.7 P1_1_1_2.8 P1_1_2.1 P1_1_2.2 P1_1_2.3 P1_1_2.4 P1_1_2.5 P1_1_2.6 P1_1_2.7 P1_1_2.8 P1_1_2_1.1 P1_1_2_1.2 P1_1_2_1.3 P1_1_2_1.4 P1_1_2_1.5 P1_1_2_1.6 P1_1_2_1.7 P1_1_2_1.8 P1_1_3.1 P1_1_3.2 P1_1_3.3 P1_1_3.4 P1_1_3.5 P1_1_3.6 P1_1_3.7 P1_1_3.8 P1_2.1 P1_2.2 P1_2.3 P1_2.4 P1_2.5 P1_2.6 P1_2.7 P1_2.8 P1_2_1.1 P1_2_1.2 P1_2_1.3 P1_2_1.4 P1_2_1.5 P1_2_1.6 P1_2_1.7 P1_2_1.8 P1_3.1 P1_3.2 P1_3.3 P1_3.4 P1_3.5 P1_3.6 P1_3.7 P1_3.8 P2_1.1 P2_1.2 P2_1.3 P2_1_1.1 P2_1_1.2 P2_1_1.3 P2_1_1_1.1 P2_1_1_1.2 P2_1_1_1.3 P2_1_1_1_1.1 P2_1_1_1_1.2 P2_1_1_1_1.3 P2_1_1_2.1 P2_1_1_2.2 P2_1_1_2.3 P2_1_2.1 P2_1_2.2 P2_1_2.3 P2_1_2_1.1 P2_1_2_1.2 P2_1_2_1.3 P2_1_3.1 P2_1_3.2 P2_1_3.3 P2_2.1 P2_2.2 P2_2.3 P2_2_1.1 P2_2_1.2 P2_2_1.3 P2_3.1 P2_3.2 P2_3.3 P3_1.1 P3_1.2 P3_1.3 P3_1_1.1 P3_1_1.2 P3_1_1.3 P3_1_1_1.1 P3_1_1_1.2 P3_1_1_1.3 P3_1_1_1_1.1 P3_1_1_1_1.2 P3_1_1_1_1.3 P3_1_1_2.1 P3_1_1_2.2 P3_1_1_2.3 P3_1_2.1 P3_1_2.2 P3_1_2.3 P3_1_2_1.1 P3_1_2_1.2 P3_1_2_1.3 P3_1_3.1 P3_1_3.2 P3_1_3.3 P3_2.1 P3_2.2 P3_2.3 P3_2_1.1 P3_2_1.2 P3_2_1.3 P3_3.1 P3_3.2 P3_3.3 Pot_1.1 Pot_1.2 Pot_1.3 Pot_1_1.1 Pot_1_1.2 Pot_1_1.3 Pot_1_1_1.1 Pot_1_1_1.2 Pot_1_1_1.3 Pot_1_1_1_1.1 Pot_1_1_1_1.2 Pot_1_1_1_1.3 Pot_1_1_2.1 Pot_1_1_2.2 Pot_1_1_2.3 Pot_1_2.1 Pot_1_2.2 Pot_1_2.3 Pot_1_2_1.1 Pot_1_2_1.2 Pot_1_2_1.3 Pot_1_3.1 Pot_1_3.2 Pot_1_3.3 Pot_2.1 Pot_2.2 Pot_2.3 Pot_2_1.1 Pot_2_1.2 Pot_2_1.3 Pot_3.1 Pot_3.2 Pot_3.3 R1_1.1 R1_1.2 R1_1_1.1 R1_1_1.2 R1_1_1_1.1 R1_1_1_1.2 R1_1_1_1_1.1 R1_1_1_1_1.2 R1_1_1_2.1 R1_1_1_2.2 R1_1_2.1 R1_1_2.2 R1_1_2_1.1 R1_1_2_1.2 R1_1_3.1 R1_1_3.2 R1_2.1 R1_2.2 R1_2_1.1 R1_2_1.2 R1_3.1 R1_3.2 U1.5 U1_1.1 U1_1.2 U1_1.3 U1_1.4 U1_1.5 U1_1.6 U1_1.7 U1_1.8 U1_1_1.1 U1_1_1.2 U1_1_1.3 U1_1_1.4 U1_1_1.5 U1_1_1.6 U1_1_1.7 U1_1_1.8 U1_1_1_1.1 U1_1_1_1.2 U1_1_1_1.3 U1_1_1_1.4 U1_1_1_1.5 U1_1_1_1.6 U1_1_1_1.7 U1_1_1_1.8 U1_1_1_1_1.1 U1_1_1_1_1.2 U1_1_1_1_1.3 U1_1_1_1_1.4 U1_1_1_1_1.5 U1_1_1_1_1.6 U1_1_1_1_1.7 U1_1_1_1_1.8 U1_1_1_2.1 U1_1_1_2.2 U1_1_1_2.3 U1_1_1_2.4 U1_1_1_2.5 U1_1_1_2.6 U1_1_1_2.7 U1_1_1_2.8 U1_1_2.1 U1_1_2.2 U1_1_2.3 U1_1_2.4 U1_1_2.5 U1_1_2.6 U1_1_2.7 U1_1_2.8 U1_1_2_1.1 U1_1_2_1.2 U1_1_2_1.3 U1_1_2_1.4 U1_1_2_1.5 U1_1_2_1.6 U1_1_2_1.7 U1_1_2_1.8 U1_1_3.1 U1_1_3.2 U1_1_3.3 U1_1_3.4 U1_1_3.5 U1_1_3.6 U1_1_3.7 U1_1_3.8 U1_2.1 U1_2.2 U1_2.3 U1_2.4 U1_2.5 U1_2.6 U1_2.7 U1_2.8 U1_2_1.1 U1_2_1.2 U1_2_1.3 U1_2_1.4 U1_2_1.5 U1_2_1.6 U1_2_1.7 U1_2_1.8 U1_3.1 U1_3.2 U1_3.3 U1_3.4 U1_3.5 U1_3.6 U1_3.7 U1_3.8